# EAGLE board FirstSchematic (EAGLE 7.5.0)
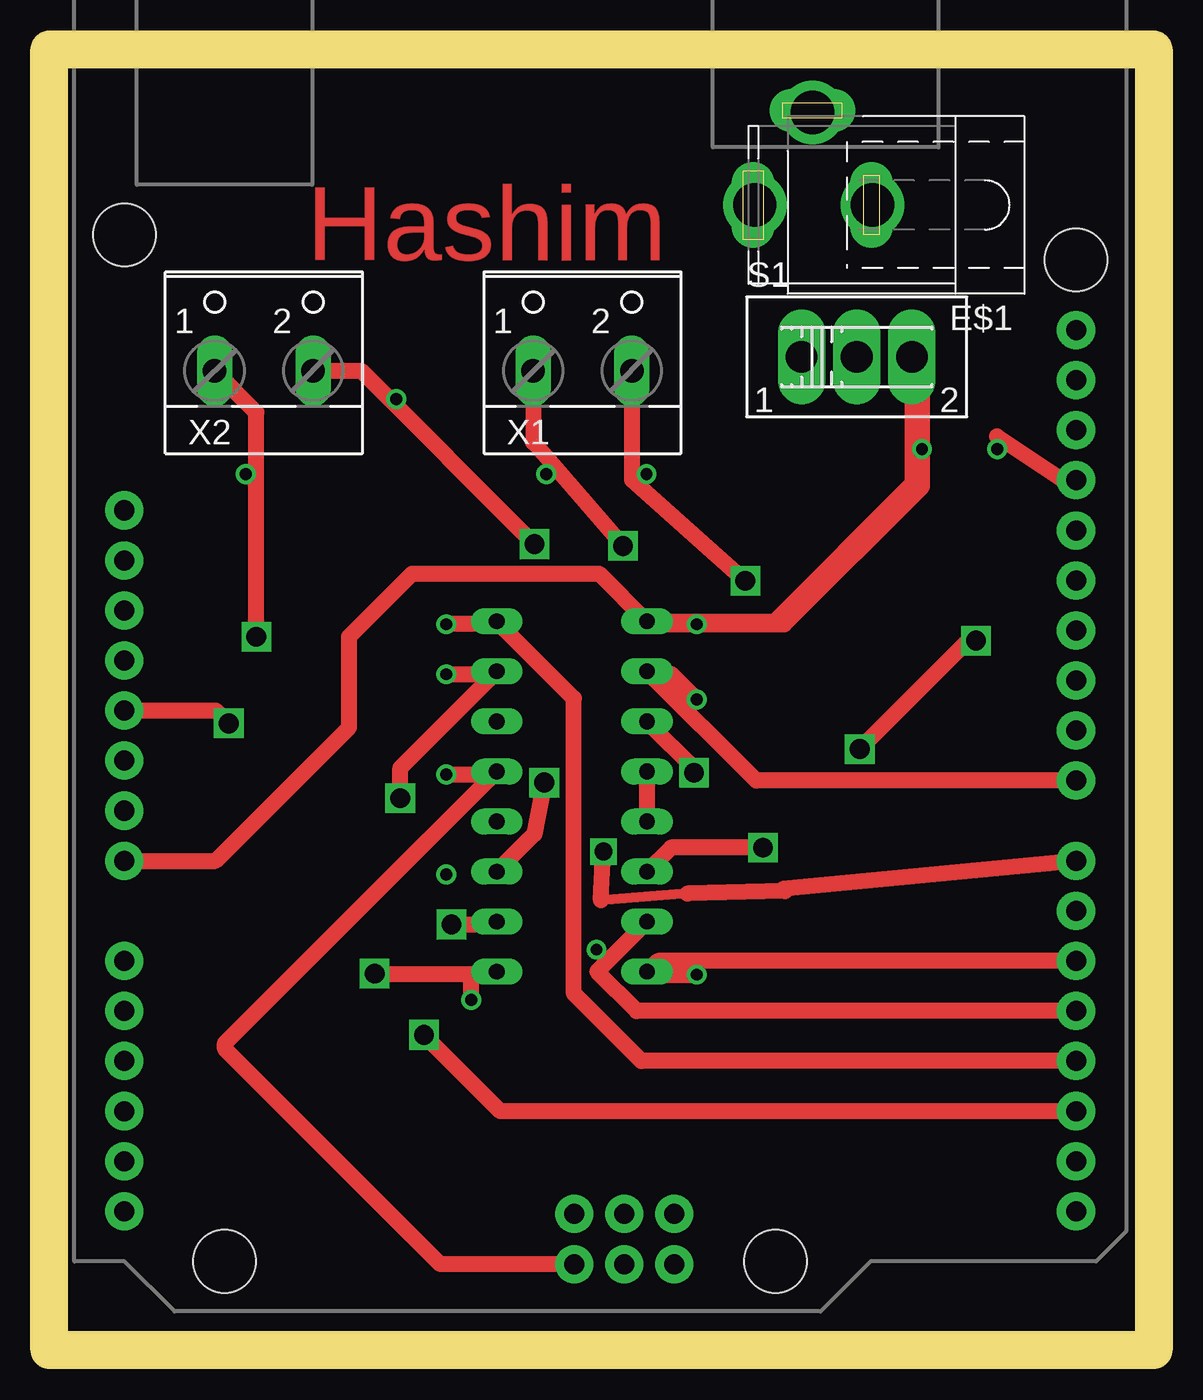
[diagram p0: board, top side]
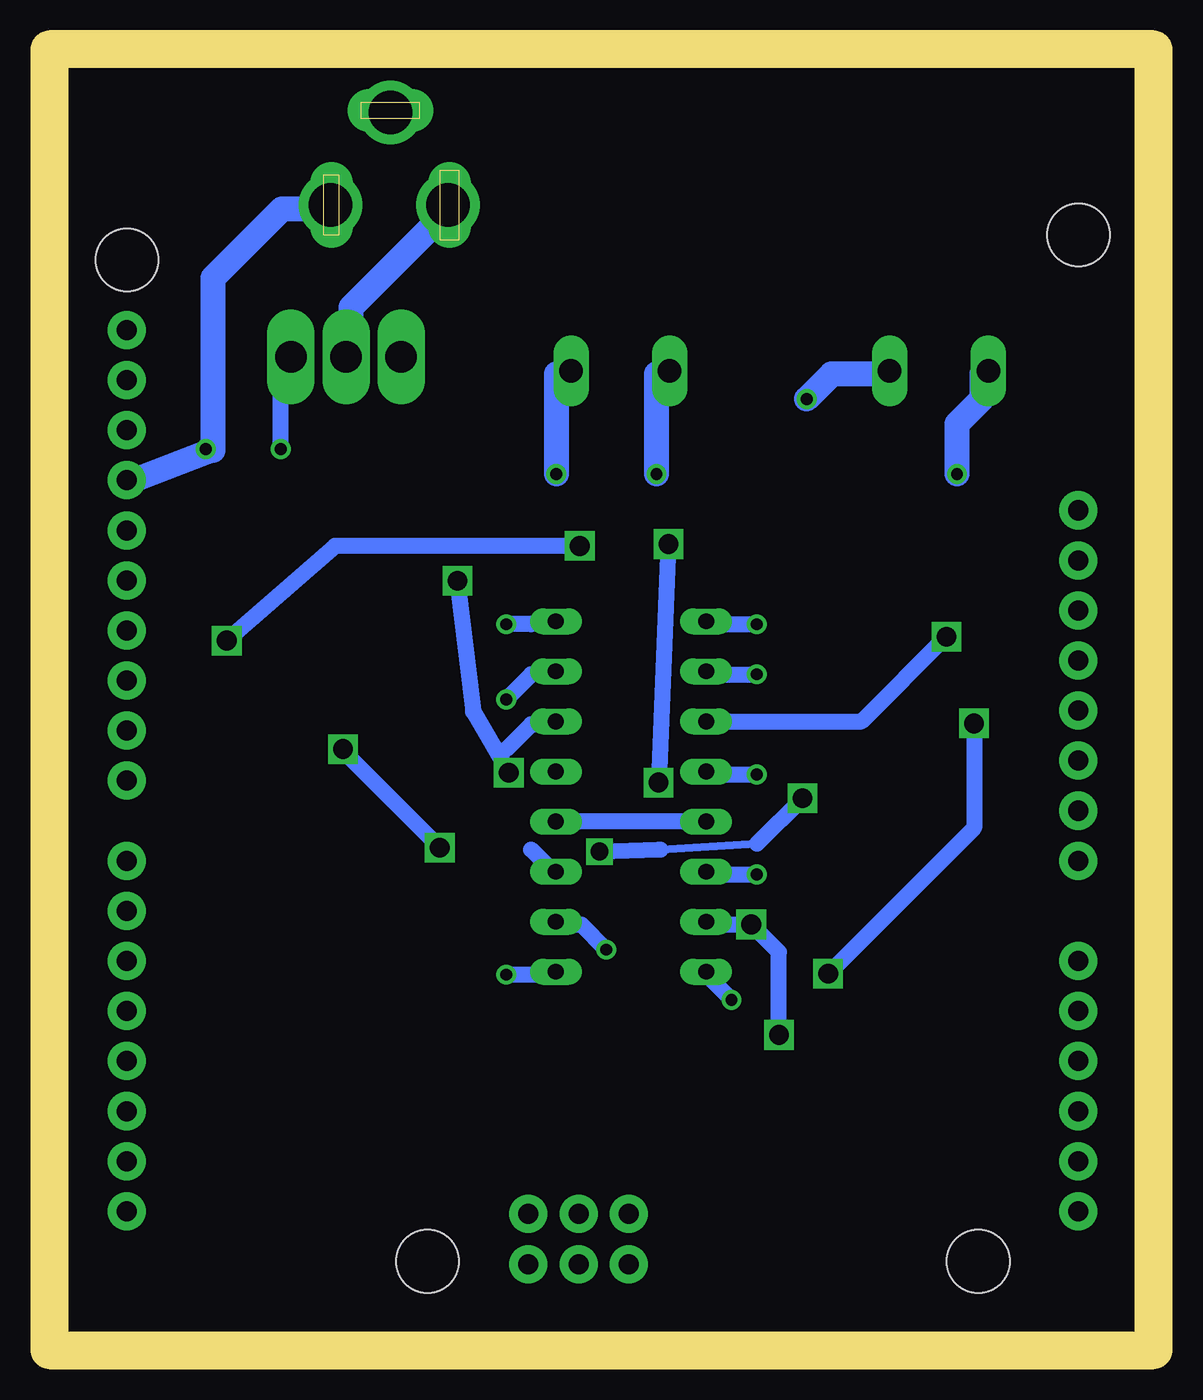
[diagram p1: board, bottom side, seen from below]

Size 56 x 66 mm. Coordinates in mm from the lower left corner, seen from the top.
Outline: 0,0 0,66 56,66 56,0 0,0
Copper layers (1*16): Top 0.035mm / dielectric 1.5mm / Bottom 0.035mm
Design rules "default": minimum track width 10mil, minimum drill 24mil, track to track 8mil, track to pad 8mil, pad to pad 8mil, via to via 8mil, smd to smd 8mil, copper to edge 40mil, drill to drill 8mil, minimum pad ring 10mil, minimum via ring 8mil, stop-mask expansion 4mil, vias tented up to drill 0mil, thermal gap 10mil

## Footprints (pad centres in the part's own frame; a part is rotated, then mirrored left to right if it is on the bottom)
5.5-2.5-BARRELCONNECTOR = drill 0.8 pad 2.184 long: 1 -3,0; 2 0,-4.8 | drill 1 pad 2.184 long: 3 3,0 | drill 2.2: P$1 -3.048,0; P$2 2.921,0; P$3 0,-4.699
ARDUINO_R3 = drill 1.016 pad 1.93: 3.3V 35.56,2.54; 5V 38.1,2.54; A0 50.8,2.54; A1 53.34,2.54; A2 55.88,2.54; A3 58.42,2.54; A4 60.96,2.54; A5 63.5,2.54; AREF 23.876,50.8; D0 63.5,50.8; D1 60.96,50.8; D2 58.42,50.8; D3 55.88,50.8; D4 53.34,50.8; D5 50.8,50.8; D6 48.26,50.8; D7 45.72,50.8; D8 41.656,50.8; D9 39.116,50.8; D10 36.576,50.8; D11 34.036,50.8; D12 31.496,50.8; D13 28.956,50.8; GND@1 40.64,2.54; GND@2 43.18,2.54; GND@3 26.416,50.8; GND@4 66.18,25.35; IOREF 30.48,2.54; MISO 63.64,30.43; MOSI 66.18,27.89; NC 27.94,2.54; RESET@1 33.02,2.54; RESET@2 63.64,25.35; SCK 63.64,27.89; SCL 18.796,50.8; SDA 21.336,50.8; VCC 66.18,30.43; VIN 45.72,2.54 | hole 3.175: 15.24,50.8; 66.04,35.56; 66.04,7.62; 13.97,2.54
SLIDE_SWITCH = drill 1.6 long: 1 -2.794,0; 2 0,0; 3 2.794,0
DIP16 = drill 0.8 long: P1 -8.89,-3.81; P2 -6.35,-3.81; P3 -3.81,-3.81; P4 -1.27,-3.81; P5 1.27,-3.81; P6 3.81,-3.81; P7 6.35,-3.81; P8 8.89,-3.81; P9 8.89,3.81; P10 6.35,3.81; P11 3.81,3.81; P12 1.27,3.81; P13 -1.27,3.81; P14 -3.81,3.81; P15 -6.35,3.81; P16 -8.89,3.81
2PIN-SCREW-TERMINAL = drill 1.194 long: 1 -2.5,-1.27; 2 2.5,-1.27

## Placement (x,y rotation side)
E$1  [5.5-2.5-BARRELCONNECTOR]  38.7,58.1 180 top
J1  ARDUINO_UNO_R3  [ARDUINO_R3]  1.27,70.55 270 top
S1  [SLIDE_SWITCH]  40.95,50.39 0 top
U$1  MOTOR_DRIVERDIP16  [DIP16]  26.5,28.09 90 top
X1  [2PIN-SCREW-TERMINAL]  27.04,50.96 0 top
X2  [2PIN-SCREW-TERMINAL]  10.88,50.96 0 top

## Library data of the parts
E$1 J1 S1 U$1 = ISCTRainingProgram
X1 X2 = ISCTRainingProgram; MPN: 237-102; OC_FARNELL: unknown; OC_NEWARK: 70K9898

## Nets
GND: U$1.P4 U$1.P5 U$1.P13
N$1: U$1.P3 X1.1
N$2: U$1.P6 X1.2
N$3: U$1.P11 X2.1
N$4: U$1.P14 X2.2
N$5: J1.5V U$1.P16
N$6: J1.GND@4 U$1.P12
N$7: J1.VIN S1.3 U$1.P8
N$8: J1.D2 U$1.P15
N$9: J1.D3 U$1.P9
N$10: J1.D8 U$1.P7
N$11: J1.D7 U$1.P10
N$12: J1.D4 U$1.P2
N$13: J1.D5 U$1.P1

## Tracks (layer width: path | path; a pad name or v marks a point on that pad's centre or on a via)
GND
  Top 0.813: U$1.P5 U$1.P4
  Bottom 0.813: U$1.P13 U$1.P4
N$1  (via drill 1)
  Top 0.813: X1.1 24.54,46.06 v29.1,40.8 | v47,36 46.6,36 v41.1,30.5 | v36.2,25.5 31.53,25.5 U$1.P3
  Bottom 0.813: v29.1,40.8 41.5,40.8 v47,36 | v41.1,30.5 41.1,30.4 v36.2,25.5
N$2  (via drill 1)
  Top 0.813: X1.2 29.54,44.16 v35.3,39.03 | v32.7,29.3 32.8,29.41 U$1.P6
  Bottom 0.813: v35.3,39.03 34.5,32.4 v32.7,29.3
N$3  (via drill 1)
  Top 0.813: v10.5,36.2 10.5,47.57 X2.1
  Bottom 0.813: U$1.P11 14.8,31.9 v10.5,36.2
N$4  (via drill 1)
  Top 0.813: X2.2 15.81,49.69 v24.6,40.9 | v25.1,28.8 24.6,26.19 U$1.P14
  Bottom 0.813: v24.6,40.9 v25.1,28.8
N$5  (via drill 1)
  Top 0.813: J1.5V 8.45,32.45 v9.1,31.8 | v16.5,19.1 22.59,19.1 U$1.P16
  Bottom 0.813: v9.1,31.8 9.1,26.5 v16.5,19.1
N$6
  Top 0.813: J1.GND@4 19.83,4.37 8.9,15.3 8.9,15.57 U$1.P12
N$7
  Top 0.813: J1.VIN 8.43,24.83 15.2,31.6 15.2,36.2 18.4,39.4 27.89,39.4 U$1.P8 36.78,36.98 43.8,44 43.8,49.7 44.3,50.2 43.93,50.2 S1.3
N$8  (via drill 1)
  Top 0.813: J1.D2 22.87,12.13 v19,16 | v20.4,21.6 22.55,21.6 U$1.P15
  Bottom 0.813: v19,16 19,20.2 v20.4,21.6
N$9
  Top 0.813: J1.D3 30.03,14.67 26.6,18.1 26.6,33.07 U$1.P9
N$10
  Top 0.813: J1.D8 35.86,28.89 U$1.P7
N$11  (via drill 0.9, 1)
  Top 0.5: 32.37,23.17 27.97,22.83
  Top 0.813: J1.D7 37.2,23.4 37.3,23.4 37.3,23.3 32.37,23.17 | 27.97,22.83 v28.1,25.3 | v17.8,28 17.8,29.55 U$1.P10
  Bottom 0.406: 25,25.4 20.1,25.7
  Bottom 0.813: v28.1,25.3 25.1,25.4 25,25.4 | 20.1,25.7 v17.8,28
N$12
  Top 0.813: J1.D4 29.79,17.21 27.8,19.2 27.8,19.23 U$1.P2
N$13
  Top 0.813: J1.D5 30.86,19.75 U$1.P1
S$1
  Bottom 1.27: 41.9,57.9 44.2,57.9 47.7,54.4 47.7,45.66 51.8,44.1
S$2
  Bottom 1.27: 35.8,58.1 35.8,57.8 40.7,52.9 40.7,50.4 40.9,50.2
S$3  (via drill 0.6)
  Bottom 1.27: 13.78,49.53 16.32,49.53 v17.59,48.26
S$4  (via drill 0.6)
  Bottom 1.27: 8.7,49.53 8.7,48.26 9.97,46.99 v9.97,44.45
S$5  (via drill 0.6)
  Bottom 1.27: 25.21,49.53 v25.21,44.45
S$6  (via drill 0.6)
  Bottom 1.27: 30.29,49.53 v30.29,44.45
S$7  (via drill 0.6)
  Bottom 0.813: v44.26,45.72 44.26,49.53
S$8  (via drill 0.6)
  Top 0.813: 22.67,36.83 v20.13,36.83
  Bottom 0.813: 22.67,36.83 v20.13,36.83
S$9  (via drill 0.6)
  Top 0.813: 22.67,34.29 v20.13,34.29
  Bottom 0.813: 22.67,34.29 v20.13,34.29
S$10  (via drill 0.6)
  Top 0.813: v20.13,29.21 22.67,29.21
  Bottom 0.813: 22.67,29.21 v20.13,29.21
S$11  (via drill 0.6)
  Bottom 0.813: 22.67,24.13 v20.13,24.13
S$12
  Bottom 0.813: 22.67,21.59 20.13,21.59
S$13  (via drill 0.6)
  Top 0.813: v21.4,17.78 21.4,19.05
  Bottom 0.813: 22.67,19.05 v21.4,17.78
S$14  (via drill 0.6)
  Top 0.813: 30.29,19.05 v32.83,19.05
  Bottom 0.813: 30.29,19.05 v32.83,19.05
S$15  (via drill 0.6)
  Bottom 0.813: 30.29,21.59 29.02,21.59 v27.75,20.32
S$16
  Bottom 0.813: 30.29,24.13 31.56,25.4
S$17
  Bottom 0.813: 30.29,31.75 31.56,31.75 32.83,30.48
S$18  (via drill 0.6)
  Top 0.813: 31.56,34.29 v32.83,33.02
  Bottom 0.813: 31.56,34.29 v32.83,33.02
S$19  (via drill 0.6)
  Top 0.813: 31.56,36.83 v32.83,36.83 | v32.83,36.83 35.37,36.83 37.27,36.83 44.26,43.81 44.26,49.53 | 30.29,36.83 v32.83,36.83
  Bottom 0.813: 31.56,36.83 v32.83,36.83
S$20
  Top 0.813: 51.88,43.81 48.07,46.35
S$21  (via drill 0.6)
  other vias: 48.07,45.72

## Text on the board
Top: Hashim